# EAGLE board evm (EAGLE 9.6.2)
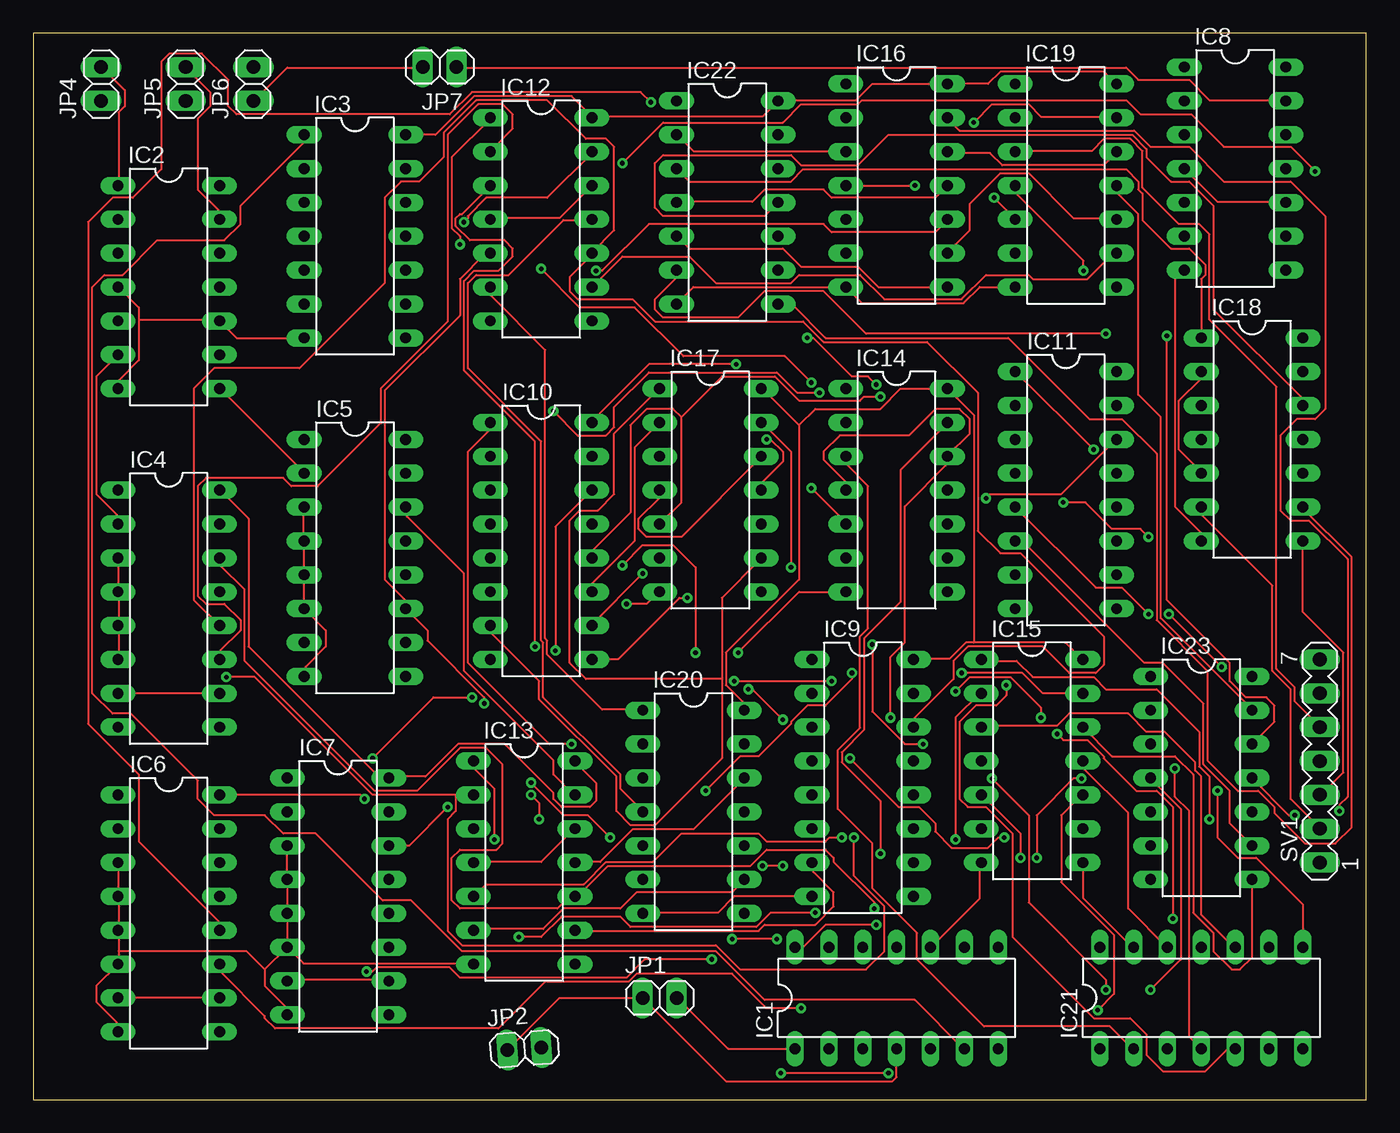
[diagram p0: board, top side]
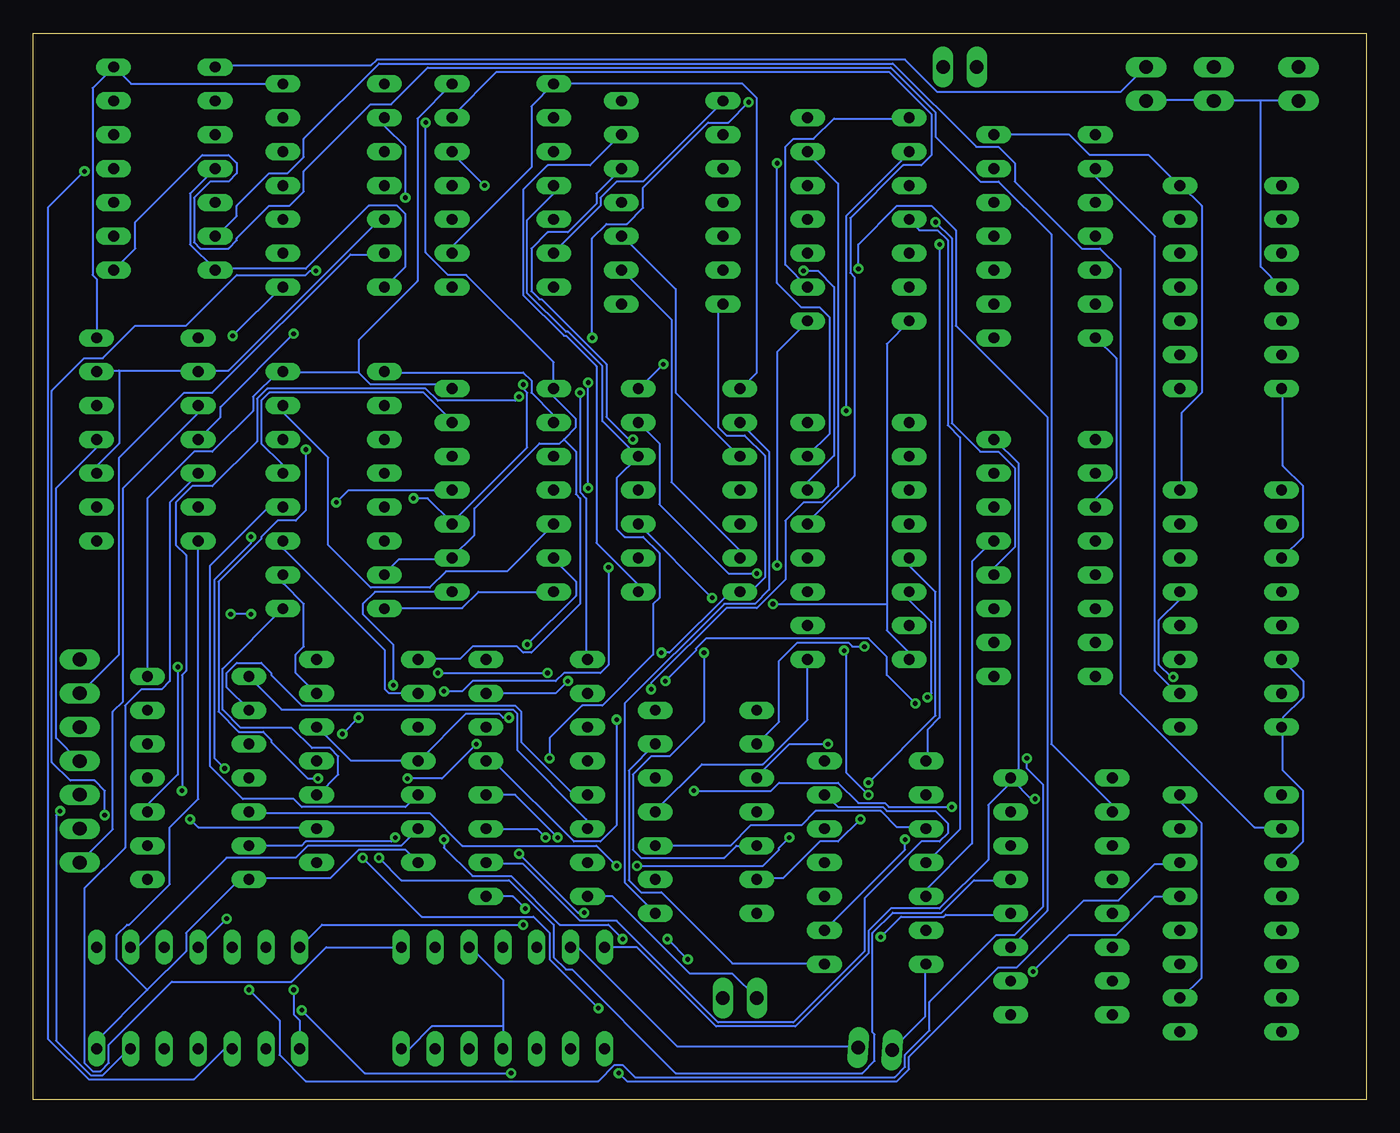
[diagram p1: board, bottom side, seen from below]

Size 100 x 80 mm. Coordinates in mm from the lower left corner, seen from the top.
Outline: 0,0 100,0 100,80 0,80 0,0
Copper layers (1*16): Top 0.035mm / dielectric 1.5mm / Bottom 0.035mm
Design rules "default": minimum track width 6mil, minimum drill 0.35mm, track to track 6mil, track to pad 6mil, pad to pad 6mil, via to via 6mil, smd to smd 6mil, copper to edge 40mil, drill to drill 6mil, minimum pad ring 10mil, minimum via ring 8mil, stop-mask expansion 4mil, vias tented up to drill 0mil, thermal gap 10mil

## Footprints (pad centres in the part's own frame; a part is rotated, then mirrored left to right if it is on the bottom)
DIL14 = drill 0.813 long: 1 -7.62,-3.81; 2 -5.08,-3.81; 3 -2.54,-3.81; 4 0,-3.81; 5 2.54,-3.81; 6 5.08,-3.81; 7 7.62,-3.81; 8 7.62,3.81; 9 5.08,3.81; 10 2.54,3.81; 11 0,3.81; 12 -2.54,3.81; 13 -5.08,3.81; 14 -7.62,3.81
DIL16 = drill 0.813 long: 1 -8.89,-3.81; 2 -6.35,-3.81; 3 -3.81,-3.81; 4 -1.27,-3.81; 5 1.27,-3.81; 6 3.81,-3.81; 7 6.35,-3.81; 8 8.89,-3.81; 9 8.89,3.81; 10 6.35,3.81; 11 3.81,3.81; 12 1.27,3.81; 13 -1.27,3.81; 14 -3.81,3.81; 15 -6.35,3.81; 16 -8.89,3.81
1X02 = drill 1.016 long: 1 -1.27,0; 2 1.27,0
MA07-1 = drill 1.016 long: 1 -7.62,0; 2 -5.08,0; 3 -2.54,0; 4 0,0; 5 2.54,0; 6 5.08,0; 7 7.62,0

## Placement (x,y rotation side)
IC1  74ACT74N  [DIL14]  64.77,7.62 0 top
IC2  74ACT74N  [DIL14]  10.16,60.96 270 top
IC3  74AC04N  [DIL14]  24.13,64.77 270 top
IC4  74AC160N  [DIL16]  10.16,36.83 270 top
IC5  74AC160N  [DIL16]  24.13,40.64 270 top
IC6  74AC160N  [DIL16]  10.16,13.97 270 top
IC7  74AC160N  [DIL16]  22.86,15.24 270 top
IC8  74AC74N  [DIL14]  90.17,69.85 270 top
IC9  74HC85N  [DIL16]  62.23,24.13 270 top
IC10  74HC85N  [DIL16]  38.1,41.91 270 top
IC11  74HC85N  [DIL16]  77.47,45.72 270 top
IC12  74AC08N  [DIL14]  38.1,66.04 270 top
IC13  74AC08N  [DIL14]  36.83,17.78 270 top
IC14  74AC08N  [DIL14]  64.77,45.72 270 top
IC15  74AC08N  [DIL14]  74.93,25.4 270 top
IC16  74AC08N  [DIL14]  64.77,68.58 270 top
IC17  74AC08N  [DIL14]  50.8,45.72 270 top
IC18  74AC08N  [DIL14]  91.44,49.53 270 top
IC19  74AC08N  [DIL14]  77.47,68.58 270 top
IC20  74AC32N  [DIL14]  49.53,21.59 270 top
IC21  74AC32N  [DIL14]  87.63,7.62 0 top
IC22  74AC32N  [DIL14]  52.07,67.31 270 top
IC23  74AC32N  [DIL14]  87.63,24.13 270 top
JP1  [1X02]  46.99,7.62 0 top
JP2  [1X02]  36.83,3.81 4.4 top
JP4  [1X02]  5.08,76.2 90 top
JP5  [1X02]  11.43,76.2 90 top
JP6  [1X02]  16.51,76.2 90 top
JP7  [1X02]  30.48,77.47 0 top
SV1  [MA07-1]  96.52,25.4 90 top

## Library data of the parts
IC1-IC23 = 74xx-eu
JP1 JP2 JP4-JP7 = pinhead
SV1 = con-lstb; OC_FARNELL: unknown; OC_NEWARK: unknown

## Nets
GND: IC1.4 IC1.7 IC1.10 IC2.4 IC2.7 IC2.10 IC3.7 IC4.3 IC4.4 IC4.5 IC4.6 IC4.8 IC5.3 IC5.4 IC5.5 IC5.6 IC5.8 IC6.3 IC6.4 IC6.5 IC6.6 IC6.8 IC7.3 IC7.4 IC7.5 IC7.6 IC7.8 IC8.4 IC8.7 IC8.10 IC9.8 IC10.8 IC11.8 IC12.7 IC13.7 IC14.7 IC15.7 IC16.7 IC17.7 IC18.7 IC19.7 IC20.7 IC21.7 IC22.7 IC23.7 JP1.1 JP2.1 JP4.1 JP5.1 JP6.1 JP7.1
N$1: IC1.13 JP2.2
N$2: IC1.6 IC3.1
N$3: IC1.1 JP1.2
N$4: IC3.2 IC4.7 IC4.10
N$5: IC2.6 IC4.2
N$6: IC2.1 JP4.2
N$7: IC16.3 IC22.2
N$8: IC18.1 IC22.3
N$9: IC18.4 IC22.6
N$10: IC16.6 IC22.1
N$11: IC2.13 JP5.2
N$12: IC2.8 IC5.2
N$13: IC6.2 IC8.6
N$14: IC8.1 JP6.2
N$15: IC16.8 IC22.5
N$16: IC16.11 IC22.4
N$17: IC17.3 IC22.10
N$18: IC17.6 IC22.9
N$19: IC7.2 IC8.8
N$20: IC8.13 JP7.2
N$21: IC9.6 IC23.1
N$22: IC12.3 IC20.2
N$23: IC9.5 IC23.2
N$24: IC11.6 IC23.9
N$25: IC12.6 IC20.1
N$26: IC12.8 IC20.5
N$27: IC12.11 IC20.4
N$28: IC13.3 IC20.10
N$29: IC13.6 IC20.9
N$30: IC13.8 IC20.13
N$31: IC13.11 IC20.12
N$32: IC14.3 IC21.2
N$33: IC23.3
N$34: IC11.5 IC23.10
N$35: IC14.6 IC21.1
N$36: IC14.8 IC21.5
N$37: IC14.11 IC21.4
N$38: IC15.3 IC21.10
N$39: IC15.6 IC21.9
N$40: IC15.8 IC21.13
N$41: IC15.11 IC21.12
N$42: IC10.6 IC23.4
N$43: IC17.8 IC22.13
N$44: IC10.5 IC23.5
N$45: IC17.11 IC22.12
N$46: IC18.12 IC22.11
N$47: IC1.8 IC18.2 IC18.5 IC18.10 IC18.13 IC19.2 IC19.5
N$48: IC19.4 IC23.11
N$49: IC19.11 IC23.13
N$50: IC19.8 IC23.12
N$54: IC18.9 IC22.8
U4Q0: IC4.14 IC9.9 IC13.10
U4Q1: IC4.13 IC9.11 IC13.2
U4Q2: IC4.12 IC9.14 IC12.10
U4Q3: IC4.11 IC9.1 IC12.2
U5Q0: IC5.14 IC9.10 IC13.13
U5Q1: IC5.13 IC9.12 IC13.5
U5Q2: IC5.12 IC9.13 IC12.13
U5Q3: IC5.11 IC9.15 IC12.5
U6Q0: IC6.14 IC11.9 IC15.10
U6Q1: IC6.13 IC11.11 IC15.2
U6Q2: IC6.12 IC11.14 IC14.10
U6Q3: IC6.11 IC11.1 IC14.2
U7Q0: IC7.14 IC11.10 IC15.13
U7Q1: IC7.13 IC11.12 IC15.5
U7Q2: IC7.12 IC11.13 IC14.13
U7Q3: IC7.11 IC11.15 IC14.5
U9-7: IC9.7 IC12.1 IC12.9 IC13.1 IC13.9 IC19.9
U10-7: IC10.7 IC16.1 IC16.9 IC17.1 IC17.9 IC19.10
U11-7: IC11.7 IC14.1 IC14.9 IC15.1 IC15.9 IC19.13
U18A3: IC18.3 SV1.1
U18B6: IC18.6 SV1.2
U18C8: IC18.8 SV1.3
U18D11: IC18.11 SV1.4
U19A3: IC19.3 SV1.5
U19B6: IC19.6 SV1.6
U20-3: IC16.2
U20A-3: IC10.1 IC20.3
U20B-6: IC10.14 IC16.10 IC20.6
U20C-8: IC10.11 IC17.2 IC20.8
U20D-11: IC10.9 IC17.10 IC20.11
U21-3: IC16.5
U21A-3: IC10.15 IC21.3
U21B-6: IC10.13 IC16.13 IC21.6
U21C-8: IC10.12 IC17.5 IC21.8
U21D-11: IC10.10 IC17.13 IC21.11
U23-3: IC12.4 IC12.12 IC13.4 IC13.12
U23-8: IC14.4 IC14.12 IC15.4 IC15.12 IC23.8
U23B-6: IC16.4 IC16.12 IC17.4 IC17.12 IC19.12 IC23.6
VCC: IC1.14 IC2.14 IC3.14 IC4.16 IC5.16 IC6.7 IC6.10 IC6.16 IC7.16 IC8.14 IC9.16 IC10.16 IC11.16 IC12.14 IC13.14 IC14.14 IC15.14 IC16.14 IC17.14 IC18.14 IC19.14 IC20.14 IC21.14 IC22.14 IC23.14
VCC1: IC7.7 IC7.10

## Tracks (layer width: path | path; a pad name or v marks a point on that pad's centre or on a via)
GND  (via drill 0.35)
  Top 0.152: IC18.7 87.63,42.52 85.65,44.5 85.65,61.57 86.26,62.18 IC8.7 | IC8.4 88.85,67.36 93.88,67.36 IC8.10 | IC22.7 49.53,60.96 IC16.7 62.18,59.74 69.8,59.74 71.02,60.96 IC19.7 | IC14.7 57.45,38.1 v52.88,33.53 | v44.5,37.19 46.02,37.19 46.94,38.1 IC17.7 | JP7.1 29.11,77.42 19.05,77.42 16.61,74.98 JP6.1 | IC5.8 20.42,31.85 20.42,32.46 21.95,33.98 21.95,35.2 IC5.6 20.27,36.88 20.27,39.32 IC5.5 20.27,39.47 20.27,41.91 | 20.27,41.91 20.27,44.35 IC5.3 | 20.27,41.91 IC5.4 | 7.92,58.52 7.92,59.44 6.4,60.96 IC2.4 | 7.92,58.52 7.92,55.47 6.4,53.95 6.4,53.34 IC2.7 | 7.92,58.52 13.87,58.52 IC2.10 15.24,57.15 IC3.7 | IC15.7 71.02,17.68 71.02,15.09 67.36,11.43 IC1.10 | IC9.8 52.58,15.24 51.36,14.02 45.72,14.02 IC20.7 | JP2.1 35.66,3.81 39.47,7.62 JP1.1 51.97,1.37 64.47,1.37 64.77,1.68 IC1.4 | 6.4,38.1 6.4,35.66 IC4.5 6.4,35.51 6.4,33.07 IC4.6 | 6.4,38.1 6.4,40.54 IC4.3 | 6.4,38.1 IC4.4 | IC6.8 6.25,5.18 6.25,5.79 4.72,7.32 4.72,8.53 IC6.6 6.4,10.21 6.4,11.12 | 6.4,15.24 6.4,12.8 IC6.5 6.4,12.65 6.4,11.12 | 6.4,15.24 6.4,17.68 IC6.3 | 6.4,15.24 IC6.4 | IC7.8 19.05,6.86 17.37,8.53 17.37,9.75 | IC7.6 17.37,9.75 | IC7.3 IC7.4 IC7.5 IC7.6 | 6.4,11.12 16,11.12 17.37,9.75 | IC7.6 20.27,10.21 32.92,10.21 IC13.7
  Bottom 0.152: IC8.4 88.24,67.97 88.24,64.16 86.41,62.33 IC8.7 86.26,62.33 79.55,62.33 74.83,67.06 72.69,67.06 72.08,66.45 72.08,62.48 73.61,60.96 IC19.7 | IC10.8 34.29,33.53 35.97,35.2 35.97,37.19 | 35.97,37.19 35.97,56.69 34.29,58.37 IC12.7 | IC14.7 66.6,38.1 67.82,36.88 73.61,36.88 IC11.8 | IC22.7 48.31,59.59 48.62,59.28 48.62,50.44 48.01,49.84 46.63,49.84 45.11,48.31 45.11,39.17 46.18,38.1 IC17.7 47.7,38.1 52.27,33.53 v52.88,33.53 | v44.5,37.19 35.97,37.19 | 11.43,74.98 7.92,74.98 | 7.92,74.98 5.18,74.98 JP4.1 | 11.43,74.98 16.46,74.98 JP6.1 | 11.43,74.98 JP5.1 | IC5.3 20.27,44.5 20.27,45.11 18.75,46.63 18.75,55.63 20.27,57.15 IC3.7 | 7.92,74.98 7.92,62.48 6.4,60.96 IC2.4 | 64.77,5.49 64.77,8.99 67.21,11.43 IC1.10 | 64.77,5.49 IC1.4 | IC1.7 71.78,3.81 70.1,5.49 64.77,5.49 | IC15.7 72.08,18.75 75.59,18.75 77.72,16.61 83.82,16.61 IC23.7 83.82,16.46 84.58,16.46 88.54,12.5 88.54,11.12 91.44,8.23 | IC21.7 95.25,4.42 91.44,8.23 | IC13.7 33.07,10.06 33.07,6.25 35.51,3.81 JP2.1 | IC9.8 56.54,15.24 50.75,9.45 47.55,9.45 JP1.1 | IC4.6 4.72,31.39 4.72,30.18 6.25,28.65 6.25,28.04 IC4.8 6.25,27.89 6.25,24.69 4.72,23.16 4.72,19.36 6.25,17.83 IC6.3 | IC2.7 6.25,53.34 6.25,47.55 4.72,46.02 4.72,42.22 6.25,40.69 IC4.3 | IC18.7 87.63,22.55 89.76,20.42 89.76,16.15 92.81,13.11 92.96,13.11 93.73,12.34 93.73,10.52 91.44,8.23
N$1
  Bottom 0.152: IC1.13 59.13,11.43 51.66,3.96 38.1,3.96 JP2.2
N$2
  Top 0.152: IC3.1 20.27,72.39 20.27,71.78 15.54,67.06 15.54,65.68 14.33,64.47 9.3,64.47 6.71,61.87 5.33,61.87 4.42,60.96 4.42,30.48 5.94,28.96 7.32,28.96 12.34,23.93 12.34,22.55 13.56,21.34 17.37,21.34 18.75,19.96 21.18,19.96 26.21,14.94 28.35,14.94 32.16,11.12 51.21,11.12 54.86,7.47 66.14,7.47 69.8,3.81 IC1.6
N$3
  Top 0.152: IC1.1 52.12,3.81 48.31,7.62 JP1.2
N$4
  Top 0.152: IC4.10 IC4.7
  Bottom 0.152: IC4.10 14.17,30.48 15.85,32.16 15.85,64.77 20.27,69.19 20.27,69.8 IC3.2
N$5
  Top 0.152: IC2.6 4.72,54.25 4.72,45.41 6.25,43.89 6.25,43.28 IC4.2
N$6
  Top 0.152: IC2.1 6.4,68.58 6.4,74.07 6.86,74.52 6.86,75.74 5.18,77.42 JP4.2
N$7
  Top 0.152: IC16.3 60.96,71.17 49.53,71.17 48.31,72.39 IC22.2
N$8
  Top 0.152: IC18.1 87.63,61.57 87.94,61.87 87.94,62.64 86.72,63.86 85.34,63.86 83.21,65.99 83.21,67.97 82.91,68.28 82.91,68.89 81.99,69.8 57.76,69.8 56.84,68.89 49.23,68.89 IC22.3
N$9  (via drill 0.35)
  Top 0.152: v80.47,57.45 62.48,57.45 59.28,60.66 54.86,60.66 52.88,58.67 47.24,58.67 46.63,59.28 46.63,60.05 48.16,61.57 48.16,62.18 IC22.6
  Bottom 0.152: v80.47,57.45 85.95,51.97 85.95,51.21 IC18.4
N$10
  Bottom 0.152: IC16.6 60.96,63.55 57.45,67.06 57.45,67.67 56.24,68.89 54.25,68.89 48.31,74.83 IC22.1
N$11
  Top 0.152: IC2.13 13.87,66.14 13.87,66.75 12.34,68.28 12.34,73.61 13.26,74.52 13.26,75.59 11.43,77.42 JP5.2
N$12
  Top 0.152: IC2.8 14.02,53.34 20.27,47.09 IC5.2
N$13
  Bottom 0.152: IC6.2 6.4,20.42 8.38,20.42 18.44,30.48 18.44,62.33 19.96,63.86 21.34,63.86 26.36,68.89 26.36,70.26 27.58,71.48 29.26,71.48 35.51,77.72 74.07,77.72 79.7,72.08 79.7,70.71 80.92,69.49 82.3,69.49 84.73,67.06 84.73,66.29 86.26,64.77 IC8.6
N$14
  Bottom 0.152: IC8.1 86.26,77.57 74.68,77.57 74.22,78.03 34.59,78.03 32.16,75.59 18.44,75.59 16.61,77.42 JP6.2
N$15
  Top 0.152: IC16.8 63.4,60.96 61.87,62.48 57.61,62.48 56.24,63.86 49.23,63.86 48.31,64.77 IC22.5
N$16
  Top 0.152: IC16.11 67.67,67.67 59.89,67.67 59.28,68.28 54.86,68.28 53.95,67.36 48.31,67.36 IC22.4
N$17
  Bottom 0.152: IC17.3 47.09,48.31 51.82,53.03 51.82,60.81 55.78,64.77 IC22.10
N$18
  Bottom 0.152: IC17.6 47.09,40.69 47.09,41.3 52.12,46.33 52.12,58.52 55.78,62.18 IC22.9
N$19
  Bottom 0.152: IC7.2 19.05,22.1 23.62,26.67 23.62,64.92 27.58,68.89 28.96,68.89 32.31,72.24 32.31,74.07 35.66,77.42 70.41,77.42 73.15,74.68 74.68,74.68 79.7,69.65 79.7,68.12 80.77,67.06 82.3,67.06 84.73,64.62 84.73,64.47 85.34,63.86 87.48,63.86 87.94,64.31 87.94,67.67 86.72,68.89 85.34,68.89 84.73,69.49 84.73,70.26 85.34,70.87 87.33,70.87 92.35,65.84 92.35,63.86 IC8.8
N$20
  Top 0.152: IC8.13 93.88,74.98 88.24,74.98 86.72,76.5 82.91,76.5 81.99,77.42 31.85,77.42 JP7.2
N$21
  Bottom 0.152: IC9.6 58.52,20.42 58.52,21.03 63.7,26.21 63.7,28.96 64.01,29.26 81.38,29.26 83.82,31.7 IC23.1
N$22  (via drill 0.35)
  Top 0.152: IC12.3 32.16,66.45 32,66.45 31.7,66.14 31.7,65.53 32.77,64.47 35.36,64.47 35.97,63.86 35.97,63.25 34.9,62.18 33.07,62.18 32.31,61.42 32.31,54.71 37.64,49.38 v37.64,33.98
  Bottom 0.152: v37.64,33.98 38.56,33.98 38.86,34.29 42.67,34.29 44.04,32.92 44.04,28.35 IC20.2
N$23
  Bottom 0.152: IC9.5 59.44,22.86 63.4,26.82 63.4,29.11 63.86,29.57 79.86,29.57 82.14,31.85 82.14,32 82.91,32.77 84.73,32.77 85.5,32 85.5,30.94 83.82,29.26 IC23.2
N$24
  Top 0.152: IC11.6 74.22,41.91 83.36,32.77 84.73,32.77 87.78,29.72 87.78,25.15 89.76,23.16 89.76,20.73 IC23.9
N$25
  Top 0.152: IC12.6 34.29,60.35 38.41,56.24 38.41,34.59 38.56,34.44 38.56,33.38 42.67,29.26 45.72,29.26 IC20.1
N$26  (via drill 0.35)
  Top 0.152: v49.68,33.53 49.68,39.93 48.01,41.6 45.72,41.6 v44.2,40.08
  Bottom 0.152: IC20.5 47.24,19.05 48.16,18.14 54.41,18.14 55.02,18.75 55.02,24.38 53.65,25.76 52.27,25.76 49.68,28.35 v49.68,33.53 | v44.2,40.08 44.2,56.08 41.91,58.37 IC12.8
N$27
  Top 0.152: IC12.11 41.91,65.99 39.78,65.99 35.66,61.87 33.22,61.87 32.61,61.27 32.61,54.86 38.1,49.38 38.1,34.44 38.25,34.29 38.25,30.18 44.04,24.38 44.04,23.32 45.72,21.64 IC20.4
N$28
  Bottom 0.152: IC20.10 47.7,19.05 46.18,20.57 42.37,20.57 41.3,21.64 36.42,21.64 35.2,20.42 33.07,20.42 IC13.3
N$29
  Top 0.152: IC13.6 33.07,12.8 38.25,12.8 39.78,14.33 44.04,14.33 45.26,15.54 52.43,15.54 53.34,16.46 IC20.9
N$30
  Bottom 0.152: IC20.13 55.32,24.69 55.32,16.46 54.41,15.54 52.88,15.54 47.55,10.21 40.69,10.21 IC13.8
N$31
  Top 0.152: IC13.11 40.69,17.83 42.52,17.83 44.96,20.27 49.53,20.27 53.34,24.08 IC20.12
N$32
  Top 0.152: IC14.3 60.96,47.7 62.64,46.02 62.64,35.36 62.03,34.75 62.03,27.89 60.35,26.21 60.35,21.79 62.94,19.2 62.94,15.85 66.29,12.5 66.29,10.52 71.32,5.49 80.77,5.49 82.45,3.81 IC21.2
N$34  (via drill 0.35)
  Top 0.152: v85.19,36.42 v89.15,32.46 | v83.67,36.42 81.69,38.41 79.7,38.41 IC11.5
  Bottom 0.152: IC23.10 91.44,22.1 89.15,24.38 v89.15,32.46 | v83.67,36.42 v85.19,36.42
N$35  (via drill 0.35)
  Top 0.152: v80.47,8.23 80.47,8.99 74.68,14.78 74.68,21.34 v71.93,24.08 | v66.75,26.67 65.38,26.67 62.94,29.11 v62.94,34.14
  Bottom 0.152: IC21.1 80.01,5.94 80.47,6.4 v80.47,8.23 | v71.93,24.08 69.34,24.08 v66.75,26.67 | v62.94,34.14 59.28,37.8 59.28,38.86 60.96,40.54 IC14.6
N$36  (via drill 0.35)
  Top 0.152: IC21.5 89.61,3.81 87.94,2.13 84.73,2.13 83.52,3.35 83.52,4.88 82.3,6.1 79.55,6.1 73.46,12.19 73.46,19.96 71.48,21.95 70.1,21.95 69.49,22.55 69.49,28.35 70.71,29.57 72.24,29.57 73,30.33 v73,31.09
  Bottom 0.152: v73,31.09 73,34.14 75.29,36.42 75.29,37.19 74.37,38.1 IC14.8
N$37  (via drill 0.35)
  Top 0.152: v77.27,44.81 78.94,44.81 80.92,42.82 83.06,42.82 v83.67,42.22 | v85.65,24.84 85.65,22.71 86.72,21.64 86.72,4.72 IC21.4
  Bottom 0.152: IC14.11 76.35,45.72 v77.27,44.81 | v83.67,42.22 83.67,41.76 86.41,39.01 86.41,25.6 v85.65,24.84
N$38
  Top 0.152: IC15.3 71.17,28.04 76.81,28.04 77.72,28.96 82.14,28.96 83.52,27.58 84.89,27.58 87.17,25.3 87.17,24.69 87.63,24.23 87.63,13.87 90.07,11.43 IC21.10
N$39
  Bottom 0.152: IC21.9 92.2,11.43 85.5,18.14 80.31,18.14 79.4,19.05 72.39,19.05 IC15.6
N$40
  Top 0.152: IC15.8 78.79,17.68 78.79,15.09 82.45,11.43 IC21.13
N$41
  Top 0.152: IC15.11 78.79,25.3 78.79,24.84 82.14,21.49 82.14,14.33 85.04,11.43 IC21.12
N$42  (via drill 0.35)
  Top 0.152: v32.92,30.18 30.02,30.18 v25.45,25.6 | v83.82,8.23 86.11,10.52 86.11,21.79 83.82,24.08 IC23.4
  Bottom 0.152: IC10.6 34.29,37.49 32.61,35.81 32.61,30.48 v32.92,30.18 | v25.45,25.6 25.45,24.84 24.23,23.62 24.23,14.48 26.36,12.34 27.74,12.34 32.77,7.32 32.77,5.18 34.59,3.35 34.59,2.44 35.36,1.68 54.86,1.68 55.78,2.59 56.39,2.59 57.61,1.37 79.55,1.37 81.53,3.35 81.53,5.94 v83.82,8.23
N$43
  Bottom 0.152: IC17.8 54.71,38.1 54.71,38.71 57.76,41.76 57.76,55.02 60.05,57.3 60.2,57.3 63.25,60.35 63.25,68.28 61.42,70.1 58.22,70.1 55.93,72.39 IC22.13
N$44  (via drill 0.35)
  Top 0.152: v37.34,23.77 39.78,21.34 41.6,21.34 v43.28,19.66 | v56.24,17.53 v54.71,17.53
  Bottom 0.152: IC10.5 34.29,40.08 32.31,38.1 32.31,28.8 v37.34,23.77 | v43.28,19.66 44.04,18.9 44.04,18.75 45.26,17.53 v54.71,17.53 | v56.24,17.53 57.76,19.05 67.82,19.05 70.26,21.49 83.82,21.49 IC23.5
N$45  (via drill 0.35)
  Top 0.152: v55.02,49.53 55.32,49.53 56.24,48.62 56.24,47.85 54.71,46.33 54.71,45.72 IC17.11
  Bottom 0.152: v55.02,49.53 55.32,49.53 57,51.21 57,55.17 61.87,60.05 62.03,60.05 62.64,60.66 62.64,63.86 61.42,65.08 59.89,65.08 57.76,67.21 57.76,67.97 IC22.12
N$46
  Top 0.152: IC18.12 95.25,52.58 88.54,59.28 88.54,67.06 86.72,68.89 85.34,68.89 83.52,70.71 83.52,71.32 82.45,72.39 64.16,72.39 61.87,70.1 57.61,70.1 56.84,70.87 47.24,70.87 46.63,70.26 46.63,66.9 47.24,66.29 54.86,66.29 IC22.11
N$47  (via drill 0.35)
  Top 0.152: v72.08,67.67 73.61,66.14 IC19.5 | IC18.2 87.63,54.1 85.95,52.43 85.95,48.77 87.63,47.09 IC18.5
  Bottom 0.152: 93.57,54.71 95.25,54.71 IC18.13 | 93.57,54.71 87.63,54.71 | IC18.10 95.25,47.55 93.57,49.23 93.57,54.71 | 87.63,54.71 85.34,54.71 74.07,65.99 73.76,65.99 IC19.5 | 87.63,54.71 IC18.2 | v72.08,67.67 72.08,71.48 73.61,73 73.61,73.61 IC19.2 | IC1.8 78.03,11.43 80.62,8.84 89.61,8.84 94.34,4.12 94.34,2.74 94.94,2.13 95.56,2.13 96.16,2.74 96.16,15.85 93.12,18.9 93.12,29.57 91.9,30.79 90.37,30.79 89.76,31.39 89.76,44.81 87.63,46.94 IC18.5
N$48  (via drill 0.35)
  Top 0.152: v78.79,62.18 78.79,62.94 73.76,67.97 73.76,68.58 IC19.4 | v94.64,21.34 94.18,21.34 91.44,24.08 IC23.11
  Bottom 0.152: v78.79,62.18 79.25,62.18 79.55,61.87 84.73,61.87 88.54,58.06 92.35,58.06 94.79,55.63 96.16,55.63 98.6,53.19 98.6,25.3 97.23,23.93 95.4,23.93 94.64,23.16 v94.64,21.34
N$49
  Top 0.152: IC19.11 81.38,68.58 81.38,67.97 82.91,66.45 82.91,52.88 84.58,51.21 84.58,36.12 91.44,29.26 IC23.13
N$50  (via drill 0.35)
  Top 0.152: v85.04,57.3 85.04,37.49 89.76,32.77 89.76,31.39 90.98,30.18 92.51,30.18 93.12,29.57 93.12,28.35 IC23.12
  Bottom 0.152: v85.04,57.3 81.38,60.96 IC19.8
N$54
  Top 0.152: IC18.9 95.25,44.35 98.91,40.69 98.91,20.42 97.69,19.2 95.4,19.2 93.12,21.49 93.12,21.95 91.9,23.16 90.37,23.16 88.09,25.45 88.09,32.16 84.28,35.97 84.28,48.46 81.69,51.05 79.25,51.05 73.15,57.15 59.44,57.15 57,59.59 55.93,59.59 IC22.8
U4Q0  (via drill 0.35)
  Top 0.152: IC4.14 14.02,40.54 14.02,40.08 15.85,38.25 15.85,32.92 25.6,23.16 28.8,23.16 32,26.36 33.98,26.36 35.2,25.15 35.2,19.2 34.75,18.75 32,18.75 31.39,18.14 31.39,14.94 32,14.33 39.32,14.33 40.23,15.24 IC13.10 40.84,15.24 43.13,17.53 53.8,17.53 55.02,18.75 59.44,18.75 60.05,18.14 60.05,17.83 63.09,14.78 v63.09,14.33
  Bottom 0.152: IC9.9 64.01,15.24 v63.09,14.33
U4Q1  (via drill 0.35)
  Top 0.152: v14.48,31.7 16.61,31.7 25.45,22.86 31.7,22.86 | IC13.2 31.7,22.86 | v61.57,19.66 61.57,16.76 63.86,14.48 63.86,11.12 62.48,9.75 53.03,9.75 51.21,11.58 32.16,11.58 31.09,12.65 31.09,21.03 31.7,21.64 31.7,22.86
  Bottom 0.152: v14.48,31.7 14.63,31.7 15.54,32.61 15.54,35.97 14.02,37.49 14.02,38.1 IC4.13 | v61.57,19.66 62.18,20.27 65.99,20.27 IC9.11
U4Q2
  Top 0.152: IC4.12 12.04,37.49 12.04,53.34 13.56,54.86 19.96,54.86 26.36,61.27 26.36,67.67 27.58,68.89 28.96,68.89 30.79,70.71 30.79,72.54 33.22,74.98 38.56,74.98 41.45,72.08 42.98,72.08 43.59,71.48 43.59,65.23 41.91,63.55 IC12.10 41.91,63.4 40.23,61.72 40.23,60.66 40.84,60.05 44.96,60.05 46.63,58.37 57.76,58.37 59.28,56.84 67.06,56.84 70.87,53.03 70.87,42.67 72.54,41 74.07,41 80.31,34.75 80.31,32.61 79.7,32 77.72,32 75.74,33.98 70.1,33.98 69.04,32.92 69.04,31.55 66.14,28.65 66.14,28.04 IC9.14
U4Q3  (via drill 0.35)
  Top 0.152: IC4.11 14.02,33.07 14.02,33.68 15.54,35.2 15.54,35.97 14.33,37.19 12.95,37.19 12.34,37.8 12.34,46.02 12.95,46.63 18.75,46.63 19.36,46.02 21.34,46.02 26.06,50.75 26.06,53.34 31.09,58.37 31.09,72.39 33.38,74.68 35.2,74.68 35.97,73.91 35.97,72.85 34.29,71.17 IC12.2 | v58.98,53.03 57.3,53.03 55.78,54.56 46.18,54.56 43.59,51.97 43.59,50.44 42.98,49.84 40.84,49.84 v39.01,51.66
  Bottom 0.152: v58.98,53.03 58.98,45.57 58.52,45.11 58.52,33.07 IC9.1 | v39.01,51.66 39.01,66.29 34.29,71.02 IC12.2
U5Q0
  Top 0.152: IC5.14 28.04,44.35 28.04,43.74 32.31,39.47 32.31,32.16 39.01,25.45 39.01,24.38 40.54,22.86 IC13.13
  Bottom 0.152: IC9.10 65.99,17.68 63.25,17.68 58.98,13.41 56.24,13.41 48.62,5.79 42.98,5.79 37.64,11.12 37.64,15.09 33.38,19.36 32,19.36 31.39,19.96 31.39,20.73 32.31,21.64 35.97,21.64 36.27,21.95 39.62,21.95 40.54,22.86 IC13.13
U5Q1  (via drill 0.35)
  Top 0.152: v60.66,19.66 59.74,19.66 59.44,19.36 55.02,19.36 54.41,19.96 48.62,19.96 46.48,17.83 42.98,17.83 41.3,16.15 33.98,16.15 33.07,15.24 IC13.5
  Bottom 0.152: IC13.5 32.92,15.24 32.92,15.85 29.57,19.2 29.57,40.39 28.04,41.91 IC5.13 | IC9.12 63.86,22.86 v60.66,19.66
U5Q2  (via drill 0.35)
  Top 0.152: v32.31,65.84 32.61,66.14 32.61,66.29 33.98,67.67 38.56,67.67 41.91,71.02 IC12.13 | v56.24,28.5 53.95,30.79 v53.65,30.79
  Bottom 0.152: v32.31,65.84 31.09,64.62 31.09,50.75 28.96,48.62 27.58,48.62 26.36,47.4 26.36,41.45 27.89,39.93 27.89,39.47 IC5.12 | v56.24,28.5 56.24,20.57 57.45,19.36 59.44,19.36 65.38,25.3 65.99,25.3 IC9.13 | v53.65,30.79 53.65,31.24 48.01,36.88 45.72,36.88 43.59,39.01 43.59,43.43 42.22,44.81 40.84,44.81 39.62,46.02 39.62,68.73 41.91,71.02 IC12.13
U5Q3  (via drill 0.35)
  Top 0.152: IC12.5 34.29,63.4 33.83,63.4 32,61.57 32,58.83 26.36,53.19 26.36,39.01 27.89,37.49 27.89,36.88 IC5.11 29.57,35.2 29.57,34.44 33.83,30.18 v33.83,29.72 | v52.58,31.39 v59.89,31.39
  Bottom 0.152: IC9.15 60.81,30.48 v59.89,31.39 | v52.58,31.39 50.29,33.68 50.29,33.83 49.53,34.59 37.34,34.59 35.97,33.22 35.97,31.85 v33.83,29.72
U6Q0  (via drill 0.35)
  Top 0.152: v64.16,1.98 v56.08,1.98 | v79.86,6.71 81.08,7.92 81.08,12.34 77.11,16.31 77.11,21.34 78.64,22.86 IC15.10
  Bottom 0.152: v56.08,1.98 55.47,1.37 35.2,1.37 34.29,2.29 34.29,3.2 27.58,9.91 26.21,9.91 21.18,14.94 18.59,14.94 15.85,17.68 14.02,17.68 IC6.14 | v64.16,1.98 75.13,1.98 v79.86,6.71 | IC11.9 85.8,32.31 85.8,29.26 84.43,27.89 80.62,27.89 79.1,26.36 77.72,26.36 77.11,25.76 77.11,24.38 78.64,22.86 IC15.10
U6Q1  (via drill 0.35)
  Top 0.152: v24.99,9.6 25.45,9.6 25.76,9.91 31.24,9.91 32,9.14 44.5,9.14 45.87,10.52 v50.9,10.52 | v55.78,12.04 v52.43,12.04 | v69.19,19.51 69.19,28.65 71.02,30.48 IC15.2
  Bottom 0.152: IC6.13 15.85,15.24 18.75,12.34 22.25,12.34 v24.99,9.6 | v52.43,12.04 v50.9,10.52 | v55.78,12.04 56.84,13.11 60.5,13.11 64.16,16.76 67.06,16.76 69.19,18.9 v69.19,19.51 | IC15.2 73.3,30.48 73.61,30.79 73.61,33.68 81.23,41.3 81.23,41.91 IC11.11
U6Q2  (via drill 0.35)
  Top 0.152: v46.33,74.83 45.57,75.59 32.92,75.59 31.24,73.91 15.24,73.91 14.63,74.52 14.63,76.5 12.65,78.49 10.21,78.49 9.6,77.88 9.6,69.8 7.47,67.67 5.94,67.67 4.12,65.84 4.12,28.19 7.92,24.38 7.92,19.36 13.87,13.41 13.87,12.8 IC6.12 | v58.06,57.15 58.52,57.15 61.42,54.25 62.64,54.25 v63.25,53.65 | v71.48,45.11 71.78,45.41 77.11,45.41 81.23,49.53 IC11.14
  Bottom 0.152: v46.33,74.83 47.85,73.3 49.38,73.3 54.25,68.43 54.25,66.9 55.47,65.68 57,65.68 58.06,64.62 v58.06,57.15 | v63.25,53.65 63.25,53.34 62.94,53.03 62.94,48.92 68.58,43.28 | v71.48,45.11 70.41,45.11 68.58,43.28 | 68.58,43.28 IC14.10
U6Q3  (via drill 0.35)
  Top 0.152: v57.61,6.86 55.02,6.86 52.43,9.45 45.26,9.45 44.65,8.84 38.41,8.84 34.9,5.33 18.14,5.33 17.37,6.1 17.37,6.25 14.02,9.6 14.02,10.06 IC6.11 | v75.29,18.14 75.29,21.34 78.03,24.08 v78.64,24.08 | v79.55,48.77 73.76,54.56 IC11.1
  Bottom 0.152: v57.61,6.86 61.27,10.52 61.27,12.5 62.48,13.72 70.87,13.72 v75.29,18.14 | v78.64,24.08 79.4,24.08 82.14,26.82 82.14,26.98 82.75,27.58 84.58,27.58 86.11,29.11 86.11,38.86 82.91,42.06 82.91,42.22 81.69,43.43 80.31,43.43 79.55,44.2 v79.55,48.77 | IC14.2 60.96,51.36 62.64,53.03 62.64,53.95 63.25,54.56 73.61,54.56 IC11.1
U7Q0  (via drill 0.35)
  Top 0.152: IC7.14 28.19,19.05 v31.09,21.95 | v50.44,23.16 53.03,25.76 54.41,25.76 56.84,28.19 56.84,28.35 58.06,29.57 59.44,29.57 61.42,31.55 v61.42,32 | v69.65,32 74.22,32 75.74,30.48 IC15.13
  Bottom 0.152: v31.09,21.95 35.81,21.95 36.12,22.25 38.1,22.25 39.62,23.77 44.04,23.77 44.65,23.16 v50.44,23.16 | v69.65,32 v61.42,32 | IC11.10 81.23,39.32 81.23,38.71 79.7,37.19 79.7,33.98 80.31,33.38 80.31,32 78.79,30.48 IC15.13
U7Q1  (via drill 0.35)
  Top 0.152: v74.07,18.14 74.07,19.96 71.17,22.86 IC15.5
  Bottom 0.152: v74.07,18.14 72.39,16.46 64.31,16.46 60.96,13.11 60.96,10.67 60.05,9.75 59.59,9.75 51.82,1.98 37.8,1.98 36.88,2.9 36.88,4.88 37.03,5.03 37.03,12.5 35.51,14.02 31.85,14.02 29.41,16.46 26.67,16.46 IC7.13 | IC11.12 81.38,44.35 82.45,44.35 86.72,40.08 86.72,24.99 84.28,22.55 80.47,22.55 79.86,21.95 72.08,21.95 71.17,22.86 IC15.5
U7Q2  (via drill 0.35)
  Top 0.152: v36.42,12.19 38.1,12.19 39.62,13.72 44.04,13.72 44.81,12.95 54.25,12.95 55.32,14.02 v58.67,14.02 | v63.55,18.44 63.55,22.4 60.66,25.3 60.66,26.06 62.33,27.74 62.33,34.59 65.08,37.34 65.08,47.24 68.58,50.75 IC14.13
  Bottom 0.152: v36.42,12.19 34.9,13.72 31.7,13.72 31.55,13.87 26.67,13.87 IC7.12 | v58.67,14.02 59.13,14.02 v63.55,18.44 | IC11.13 81.38,47.09 81.38,47.7 82.91,49.23 82.91,52.43 82.3,53.03 70.71,53.03 68.58,50.9 IC14.13
U7Q3  (via drill 0.35)
  Top 0.152: v38.1,62.33 41,59.44 45.11,59.44 48.77,55.78 56.39,55.78 v58.37,53.8 | v58.37,45.87 60.96,43.28 IC14.5
  Bottom 0.152: IC7.11 23.93,14.17 23.93,51.21 30.79,58.06 30.79,65.23 32.61,67.06 35.2,67.06 38.1,64.16 v38.1,62.33 | v58.37,45.87 v58.37,53.8 | IC11.15 81.23,51.97 81.23,51.51 77.88,48.16 77.88,41.6 74.68,38.41 70.26,38.41 69.04,39.62 64.47,39.62 60.96,43.13 IC14.5
U9-7  (via drill 0.35)
  Top 0.152: v34.59,19.51 34.59,23.32 33.07,24.84 33.07,25.3 IC13.1 | IC9.7 58.52,17.68 58.52,17.07 60.05,15.54 60.05,14.48 58.67,13.11 54.86,13.11 54.41,12.65 40.69,12.65 IC13.9 | IC12.9 44.2,63.25 49.23,63.25 51.21,61.27 56.84,61.27 57.45,61.87 62.03,61.87 63.86,60.05 69.65,60.05 71.48,61.87 74.68,61.87 74.98,61.57 79.1,61.57 80.92,63.4 81.23,63.4 IC19.9 | v32,64.16 32,64.77 31.39,65.38 31.39,70.71 34.29,73.61 IC12.1
  Bottom 0.152: v34.59,19.51 34.59,18.75 IC13.9 | IC12.9 43.59,62.64 43.59,71.48 42.98,72.08 41.45,72.08 39.93,73.61 34.29,73.61 IC12.1 | v32,64.16 32,28.65 32.92,27.74 32.92,25.45 IC13.1
U10-7
  Top 0.152: IC19.10 81.23,66.14 78.03,66.14 74.68,69.49 72.54,69.49 70.26,67.21 70.26,65.23 68.58,63.55 IC16.9 | IC10.7 34.29,35.05 37.95,31.39 37.95,30.02 43.74,24.23 43.74,21.64 44.81,20.57 46.63,20.57 51.66,25.6 51.66,31.55 | 51.66,31.55 51.66,37.64 54.56,40.54 IC17.9 | 51.66,31.55 41.45,31.55 40.23,32.77 40.23,43.43 41,44.2 42.37,44.2 43.59,45.41 43.59,49.99 46.94,53.34 IC17.1
  Bottom 0.152: IC16.9 68.58,64.01 62.64,69.95 62.64,74.52 IC16.1 46.79,76.2 45.72,75.13 45.72,54.56 46.94,53.34 IC17.1
U11-7  (via drill 0.35)
  Top 0.152: v88.24,21.03 88.24,24.23 87.48,24.99 87.48,27.58 84.28,30.79 80.47,30.79 79.55,31.7 74.98,31.7 73.76,32.92 71.17,32.92 IC15.1 | v70.56,73.3 71.93,74.68 74.68,74.68 75.59,73.76 81.23,73.76 IC19.13
  Bottom 0.152: IC11.7 73.61,39.47 72.54,40.54 68.58,40.54 IC14.9 68.58,40.69 66.9,42.37 66.9,44.35 62.03,49.23 60.5,49.23 60.2,49.53 | 60.2,49.53 59.28,50.44 59.28,51.05 60.96,52.73 IC14.1 60.96,55.32 67.51,61.87 68.89,61.87 70.56,63.55 v70.56,73.3 | 60.2,49.53 59.28,48.62 59.28,45.41 58.98,45.11 58.98,37.19 62.64,33.53 63.25,33.53 63.7,33.98 67.06,33.98 67.97,33.07 71.02,33.07 IC15.1 | v88.24,21.03 87.63,20.42 78.79,20.42 IC15.9
U18A3
  Bottom 0.152: IC18.3 87.63,51.51 93.27,45.87 93.27,29.87 94.03,29.11 94.03,20.27 SV1.1
U18B6
  Top 0.152: IC18.6 87.63,43.89 92.96,38.56 92.96,32.16 94.34,30.79 94.34,22.55 96.47,20.42 SV1.2
U18C8
  Top 0.152: IC18.8 95.25,36.58 98.3,33.53 98.3,24.54 96.62,22.86 SV1.3
U18D11
  Bottom 0.152: IC18.11 95.25,48.92 98.3,45.87 98.3,27.13 96.62,25.45 SV1.4
U19A3
  Top 0.152: IC19.3 73.76,71.17 79.4,71.17 80.31,72.08 82.3,72.08 83.21,71.17 83.21,68.43 85.95,65.68 87.48,65.68 88.24,64.92 88.24,58.52 93.27,53.49 93.27,32.31 94.64,30.94 94.64,29.87 96.47,28.04 SV1.5
U19B6
  Bottom 0.152: IC19.6 73.76,63.4 76.2,63.4 86.56,53.03 88.7,53.03 93.57,48.16 93.57,33.38 96.47,30.48 SV1.6
U20A-3  (via drill 0.35)
  Top 0.152: IC10.1 34.29,50.29 32.61,48.62 32.61,32.77 38.71,26.67 v40.39,26.67
  Bottom 0.152: v40.39,26.67 43.28,26.67 45.72,24.23 IC20.3
U20B-6  (via drill 0.35)
  Top 0.152: v42.22,62.18 42.67,62.18 46.18,65.68 59.28,65.68 59.89,65.08 67.67,65.08 68.58,65.99 IC16.10 | v37.95,21.03 37.95,22.25 v37.34,22.86 | v39.17,33.68 39.17,42.98 IC10.14
  Bottom 0.152: IC10.14 41.91,46.33 39.93,48.31 39.93,60.96 41.15,62.18 v42.22,62.18 | v37.95,21.03 39.62,19.36 41,19.36 43.74,16.61 45.72,16.61 IC20.6 | v37.34,22.86 39.01,24.54 39.01,33.53 v39.17,33.68
U20C-8
  Top 0.152: IC10.11 41.91,38.71 45.11,41.91 45.11,48.92 IC17.2
  Bottom 0.152: IC17.2 44.81,48.62 44.81,38.25 45.87,37.19 48.16,37.19 55.63,29.72 55.63,16.31 53.34,14.02 IC20.8
U20D-11  (via drill 0.35)
  Top 0.152: v49.07,37.64 48.46,37.64 43.89,33.07 41.91,33.07 IC10.9
  Bottom 0.152: IC10.9 41.91,28.5 45.26,25.15 49.84,25.15 53.34,21.64 IC20.11 | v49.07,37.64 IC17.10
U21A-3  (via drill 0.35)
  Top 0.152: v96.16,69.65 94.34,71.48 89.31,71.48 86.87,73.91 83.06,73.91 81.99,74.98 62.18,74.98 61.87,74.68 57.61,74.68 56.24,73.3 47.24,73.3 v44.2,70.26
  Bottom 0.152: IC21.3 85.65,3.81 87.94,1.52 95.86,1.52 98.91,4.57 98.91,66.9 v96.16,69.65 | v44.2,70.26 44.2,61.27 42.37,59.44 41,59.44 40.23,58.67 40.23,49.99 41.91,48.31 IC10.15
U21B-6  (via drill 0.35)
  Top 0.152: v97.99,21.64 97.99,22.1 98.6,22.71 98.6,40.54 95.71,43.43 94.34,43.43 93.57,44.2 93.57,49.84 94.79,51.05 96.16,51.05 96.93,51.82 96.93,66.29 94.34,68.89 89.31,68.89 86.72,71.48 83.82,71.48 82.6,72.69 69.49,72.69 68.58,73.61 IC16.13
  Bottom 0.152: IC10.13 41.91,43.28 38.41,46.79 38.41,61.72 38.71,62.03 38.71,66.14 34.75,70.1 33.38,70.1 32.61,70.87 32.61,73.91 35.81,77.11 65.23,77.11 68.58,73.76 IC16.13 | v97.99,21.64 98.3,21.34 98.3,4.42 95.71,1.83 94.79,1.83 92.81,3.81 IC21.6
U21C-8  (via drill 0.35)
  Top 0.152: IC10.12 41.91,41.15 44.81,44.04 44.81,50.6 46.02,51.82 48.01,51.82 48.62,51.21 | 48.62,51.21 48.62,44.81 IC17.5 | IC21.8 95.25,14.63 91.75,18.14 90.37,18.14 88.85,19.66 v88.85,23.16 | v63.55,52.73 62.33,52.73 62.03,52.43 57.45,52.43 55.63,54.25 51.66,54.25 48.62,51.21
  Bottom 0.152: v88.85,23.16 88.85,31.85 88.54,32.16 88.54,40.84 89.31,41.6 89.31,44.81 88.09,46.02 86.56,46.02 83.21,49.38 83.21,52.58 82.45,53.34 70.56,53.34 69.65,52.43 63.86,52.43 v63.55,52.73
U21D-11  (via drill 0.35)
  Top 0.152: v85.5,13.56 85.5,21.95 84.28,23.16 82.75,23.16 80.31,25.6 80.31,25.76 79.1,26.98 77.27,26.98 v76.81,27.43 | v75.59,28.65 75.59,29.41 73.3,31.7 70.26,31.7 v69.19,30.63 | v56.84,39.93 56.84,48.62 54.71,50.75 IC17.13 | v45.72,39.47 41.91,35.66 IC10.10
  Bottom 0.152: v85.5,13.56 IC21.11 | v75.59,28.65 v76.81,27.43 | v69.19,30.63 67.82,30.63 67.06,31.39 60.81,31.39 60.2,32 57.45,32 56.84,32.61 v56.84,39.93 | v45.72,39.47 47.85,39.47 53.03,44.65 53.03,49.23 IC17.13
U23-3
  Top 0.152: IC13.4 33.07,17.83 38.1,17.83 40.54,20.27 IC13.12 | IC12.12 39.47,66.14 34.29,66.14 IC12.4
  Bottom 0.152: IC13.4 32.92,17.83 30.48,20.27 30.48,49.68 31.39,50.6 31.39,64.47 32.16,65.23 33.53,65.23 34.29,65.99 IC12.4
U23-8  (via drill 0.35)
  Top 0.152: IC14.4 60.96,46.33 59.28,48.01 59.28,48.62 60.5,49.84 65.68,49.84 67.67,51.82 69.49,51.82 70.26,51.05 70.26,49.99 68.58,48.31 IC14.12 68.58,47.7 65.38,44.5 65.38,34.29 64.31,33.22 v64.31,28.65 | IC23.8 91.44,10.67 90.53,9.75 89.92,9.75 88.54,11.12 88.54,12.5 87.02,14.02 87.02,24.38 85.65,25.76 80.92,25.76 IC15.12
  Bottom 0.152: IC15.12 78.64,27.89 76.2,25.45 71.17,25.45 IC15.4 71.02,25.45 67.51,28.96 65.08,28.96 64.77,28.65 v64.31,28.65
U23B-6  (via drill 0.35)
  Top 0.152: IC16.12 68.58,71.02 71.78,71.02 72.69,70.1 80.31,70.1 81.23,71.02 IC19.12 | IC17.4 46.94,45.72 46.94,45.11 45.41,43.59 45.41,42.82 46.02,42.22 48.62,42.22 54.56,48.16 IC17.12 | v72.85,19.66 72.39,19.66 71.63,18.9 68.89,18.9 67.67,20.12 67.67,20.73 66.45,21.95 64.92,21.95 v61.27,25.6 | IC16.4 v66.14,68.58
  Bottom 0.152: IC23.6 79.86,19.05 79.55,19.36 73.15,19.36 v72.85,19.66 | v61.27,25.6 61.27,27.13 58.83,29.57 57.3,29.57 53.49,33.38 53.49,37.19 53.03,37.64 53.03,41 54.25,42.22 55.63,42.22 56.24,42.82 56.24,46.63 IC17.12 54.71,48.31 57.3,50.9 57.3,55.02 59.89,57.61 60.05,57.61 62.94,60.5 62.94,65.99 60.96,67.97 IC16.4 | v66.14,68.58 68.58,71.02 IC16.12
VCC  (via drill 0.35)
  Top 0.152: IC1.14 57.76,11.43 59.44,13.11 v63.25,13.11 | IC6.10 IC6.7 | 26.67,24.23 29.41,24.23 31.85,26.67 35.36,26.67 39.01,23.01 39.01,22.55 39.62,21.95 41.76,21.95 42.22,22.4 42.22,23.77 40.69,25.3 IC13.14 | IC6.16 24.54,22.86 v24.84,22.55 | 70.56,34.29 77.42,34.29 78.64,33.07 IC15.14 | 70.56,34.29 69.95,34.29 68.73,33.07 66.14,33.07 IC9.16 | v52.73,55.17 46.18,55.17 41.91,50.9 IC10.16 | IC20.14 53.34,29.72 51.97,31.09 51.97,33.53 57.45,39.01 57.45,50.6 | 57.45,50.6 54.71,53.34 IC17.14 | 57.45,50.6 58.67,51.82 63.55,51.82 65.08,53.34 IC14.14 70.56,51.36 70.56,34.29 | 41.91,73.76 54.71,73.76 IC22.14 55.93,74.98 61.72,74.98 62.94,76.2 IC16.14 71.63,76.2 72.54,77.11 80.31,77.11 81.23,76.2 IC19.14 | IC3.14 30.18,72.39 33.07,75.29 40.39,75.29 41.91,73.76 | 41.91,73.76 IC12.14 | 26.67,24.23 25.91,24.23 16.15,33.98 16.15,43.59 14.02,45.72 IC4.16 | 26.67,24.23 IC7.16
  Bottom 0.152: v63.25,13.11 78.33,13.11 IC21.14 | IC6.16 13.87,22.86 13.87,22.25 12.34,20.73 12.34,9.14 13.87,7.62 IC6.10 | IC5.16 27.89,49.53 26.06,47.7 26.06,24.84 26.67,24.23 IC7.16 | v24.84,22.55 25.15,22.55 26.52,23.93 | 26.52,23.93 26.67,24.08 IC7.16 | IC1.14 54.71,11.43 48.77,5.49 42.82,5.49 37.34,10.97 37.34,12.65 35.66,14.33 32,14.33 28.35,17.98 28.35,22.1 26.52,23.93 | 26.52,23.93 IC7.16 | v52.73,55.17 54.56,53.34 IC17.14 | 75.59,54.56 81.23,54.56 IC11.16 81.38,54.56 81.69,54.56 83.52,52.73 83.52,51.66 86.56,48.62 87.94,48.62 91.44,45.11 IC23.14 | 75.59,54.56 74.68,53.65 68.89,53.65 IC14.14 | IC4.16 13.87,45.72 13.87,51.51 12.34,53.03 12.34,67.06 13.87,68.58 IC2.14 14.02,68.58 16.31,70.87 20.73,70.87 22.25,72.39 IC3.14 | IC19.14 92.66,76.2 93.88,77.42 IC8.14 95.56,75.89 95.56,61.87 95.25,61.57 IC18.14 | 75.59,54.56 75.59,57 71.17,61.42 71.17,73.61 IC16.14
VCC1
  Top 0.152: IC7.7 19.05,8.99 26.67,8.99 IC7.10